# EAGLE board LipStick4 (EAGLE 9.6.2)
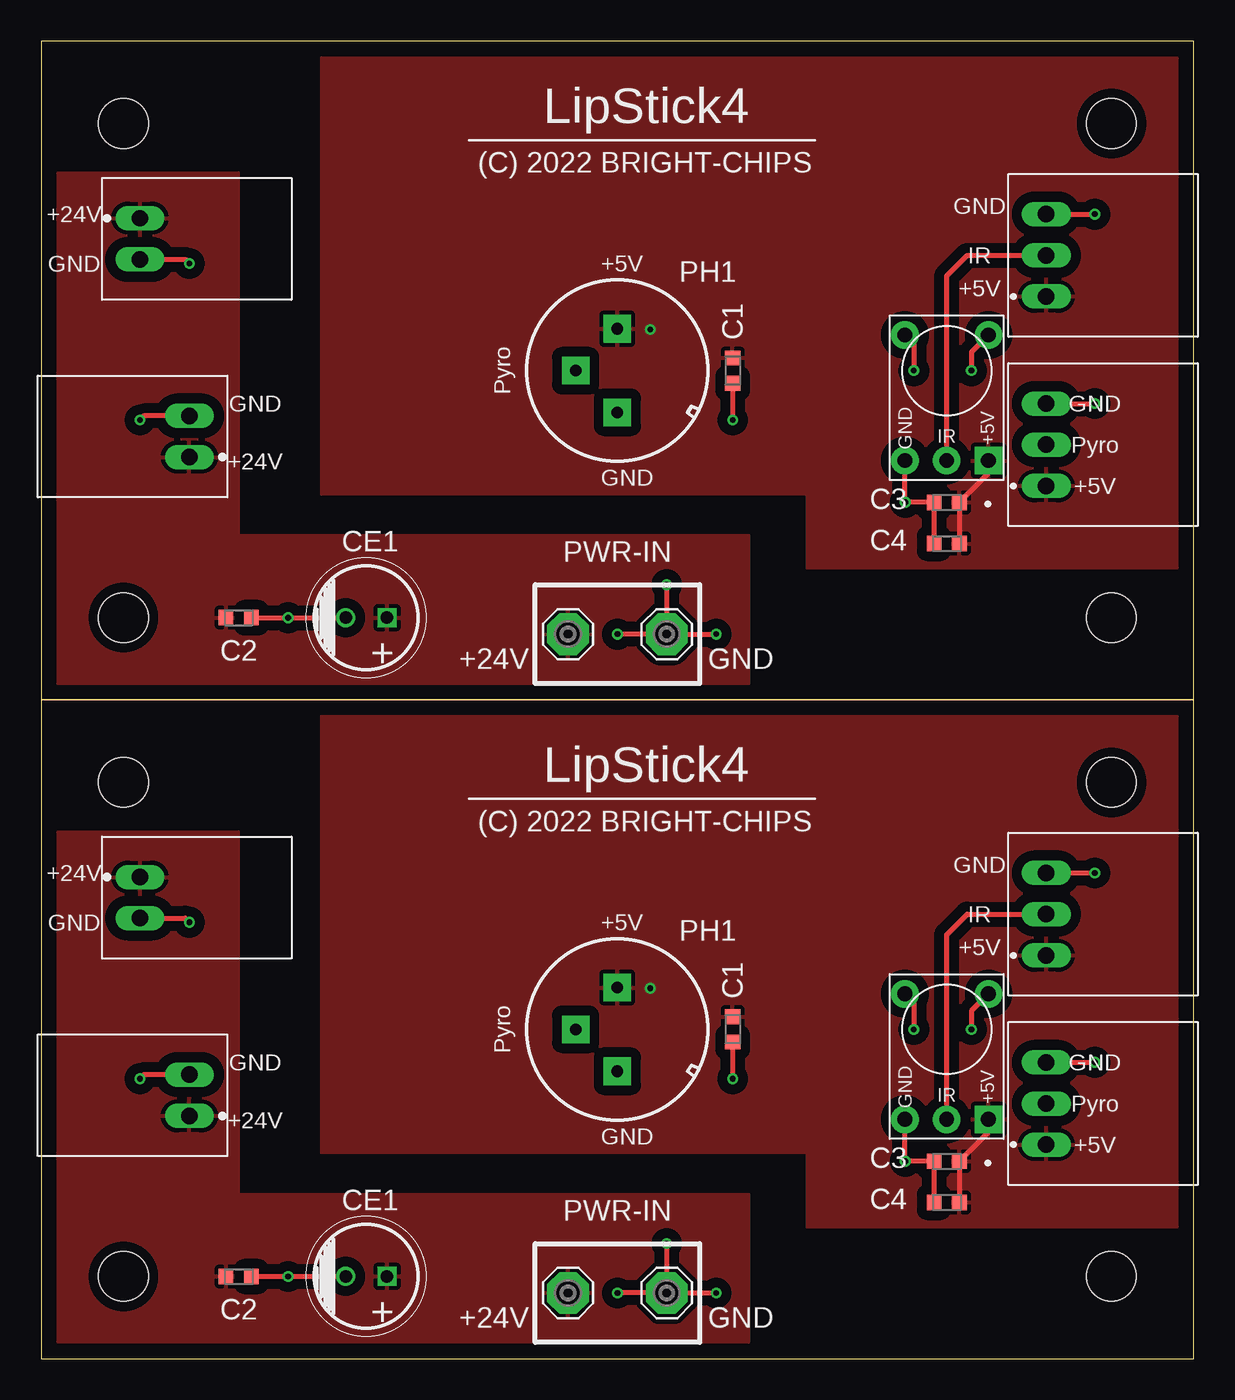
[diagram p0: board, top side]
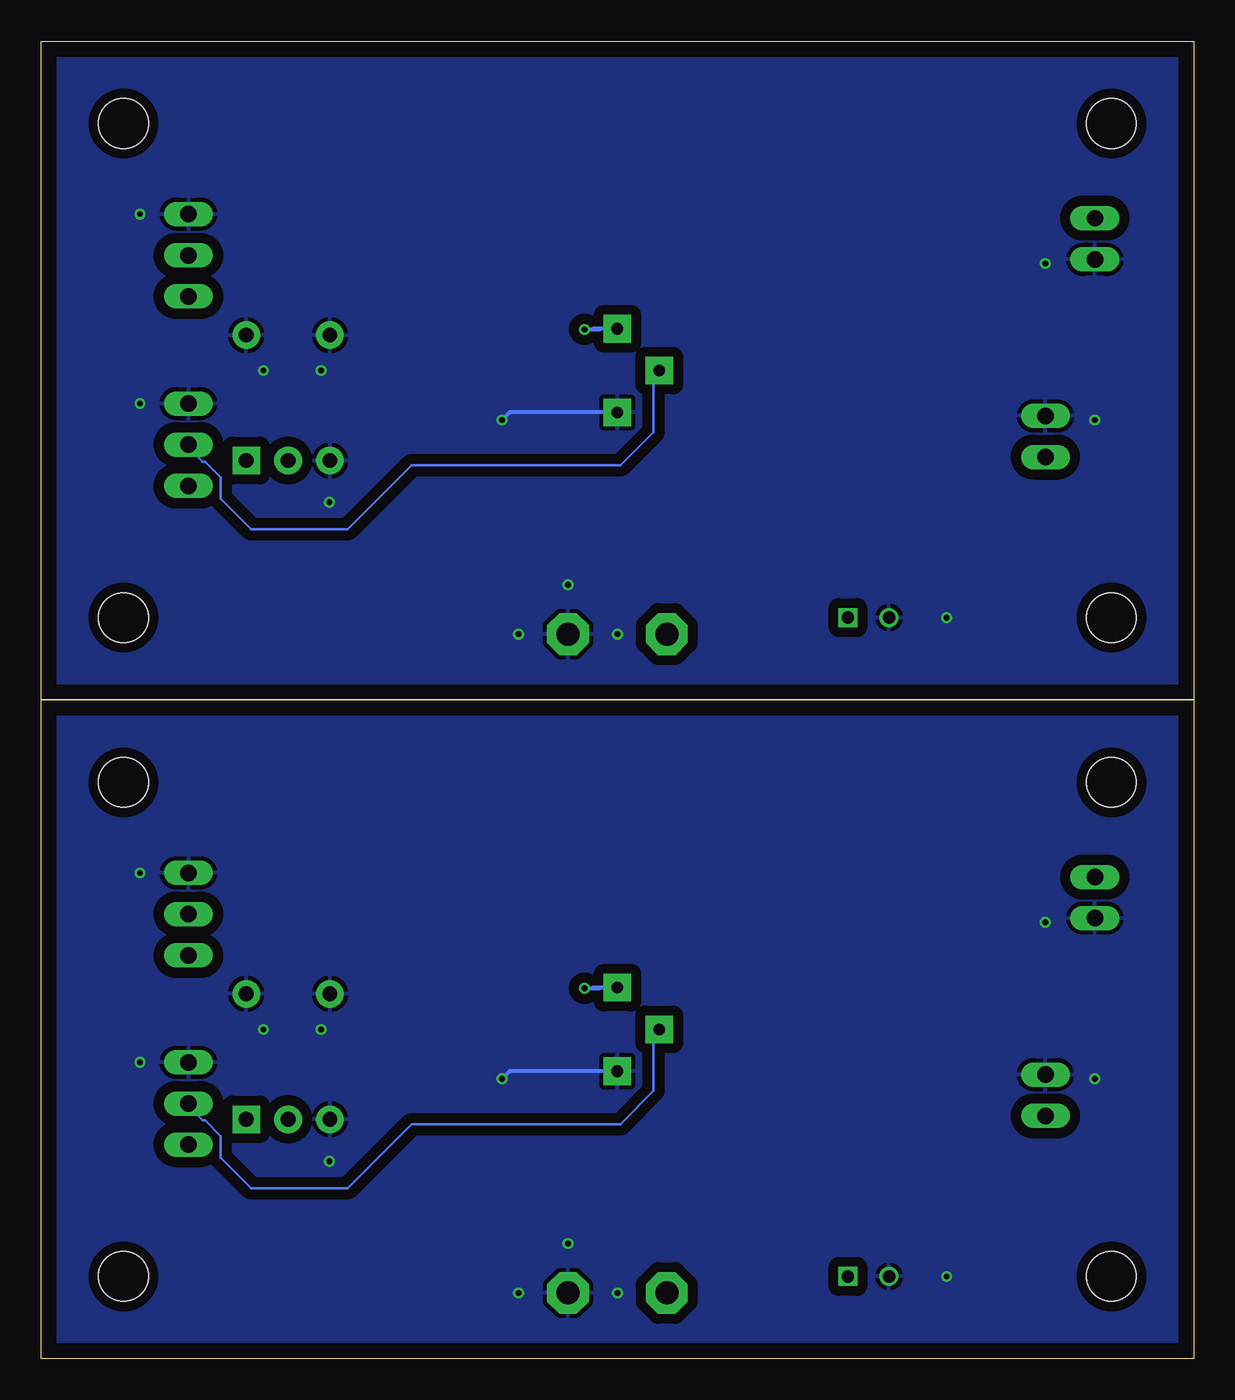
[diagram p1: board, bottom side, seen from below]

Size 70 x 80 mm. Coordinates in mm from the lower left corner, seen from the top.
Outline: 70,40 70,0 0,0 0,40
Outline: 70,40 0,40
Outline: 0,40 70,40
Outline: 70,40 70,80 0,80 0,40
Copper layers (1*16): Top 0.035mm / dielectric 1.6mm / Bottom 0.035mm
Design rules "Elecrow_2-layer_PCB_eagle_rule": minimum track width 6mil, minimum drill 12mil, track to track 6mil, track to pad 6mil, pad to pad 6mil, via to via 8mil, smd to smd 0mil, copper to edge 20mil, drill to drill 10mil, minimum pad ring 6mil, minimum via ring 6mil, stop-mask expansion 0mil, vias tented up to drill 100mil, thermal gap 10mil
Holes 3 mm at 5,35 5,5 65,5 65,35 5,75 5,45 65,45 65,75
vRestrict: 1 lines

## Footprints (pad centres in the part's own frame; a part is rotated, then mirrored left to right if it is on the bottom)
CAPC1608X90N = smd 0.89 x 0.93: 1 -0.77,0; 2 0.77,0
CAPPRD250W55D630H1220 = drill 0.75 pad 1.15 square: 1 0,0 | drill 0.75 pad 1.15: 2 2.5,0
JST_S3B-XH-A(LF)(SN) = drill 1 long: 1 2.5,-3.45; 2 0,-3.45; 3 -2.5,-3.45
SPS-442 = drill 0.9 pad 1.676 square: 1 2.54,-5.46 | drill 0.9 pad 1.676: 2 0,-5.46; 3 -2.54,-5.46; 4 -2.54,2.16; 5 2.54,2.16
SE14 = drill 1.397 pad 2.54 octagon: MP 0,0
JST_S2B-XH-A(LF)(SN) = drill 1 long: 1 -1.25,0; 2 1.25,0
VZ-STANDARD = drill 0.7 pad 1.676 square: 1 2.54,0; 2 0,-2.54; 3 -2.54,0

## Placement (x,y rotation side)
C1  GRM188R71H104KA93D  [CAPC1608X90N]  42,20 90 top
C2  GRM188R71H104KA93D  [CAPC1608X90N]  12,5 180 top
C3  GRM188R71H104KA93D  [CAPC1608X90N]  55,12 180 top
C4  GRM188R71H104KA93D  [CAPC1608X90N]  55,9.5 180 top
C5  GRM188R71H104KA93D  [CAPC1608X90N]  12,45 180 top
C6  GRM188R71H104KA93D  [CAPC1608X90N]  42,60 90 top
C7  GRM188R71H104KA93D  [CAPC1608X90N]  55,52 180 top
C8  GRM188R71H104KA93D  [CAPC1608X90N]  55,49.5 180 top
CE1  ECA-1HM470I  [CAPPRD250W55D630H1220]  21,5 180 top
CE2  ECA-1HM470I  [CAPPRD250W55D630H1220]  21,45 180 top
J1  S3B-XH-A(LF)(SN)  [JST_S3B-XH-A(LF)(SN)]  64.5,55.5 270 top
J2  S3B-XH-A(LF)(SN)  [JST_S3B-XH-A(LF)(SN)]  64.5,15.5 270 top
J3  S3B-XH-A(LF)(SN)  [JST_S3B-XH-A(LF)(SN)]  64.5,67 270 top
J4  S3B-XH-A(LF)(SN)  [JST_S3B-XH-A(LF)(SN)]  64.5,27 270 top
J5  SPS-442  [SPS-442]  55,20 0 top
J6  SPS-442  [SPS-442]  55,60 0 top
LSP1  SE14  [SE14]  32,4 0 top
LSP2  SE14  [SE14]  38,4 0 top
LSP3  SE14  [SE14]  32,44 0 top
LSP4  SE14  [SE14]  38,44 0 top
P1  S2B-XH-A(LF)(SN)  [JST_S2B-XH-A(LF)(SN)]  6,68 270 top
P2  S2B-XH-A(LF)(SN)  [JST_S2B-XH-A(LF)(SN)]  6,28 270 top
P3  S2B-XH-A(LF)(SN)  [JST_S2B-XH-A(LF)(SN)]  9,16 90 top
P4  S2B-XH-A(LF)(SN)  [JST_S2B-XH-A(LF)(SN)]  9,56 90 top
PH1  EKMC1601111  [VZ-STANDARD]  35,20 270 top
PH2  EKMC1601111  [VZ-STANDARD]  35,60 270 top

## Library data of the parts
C1-C8 = GRM188R71H104KA93D; AVAILABILITY: Warning; DESCRIPTION: SMD Capacitor X7R(EIA) with Capacitance: 0.10uF Tol. 10%. Rated Voltage: 50Vdc; MF: Murata; MP: GRM188R71H104KA93D; PACKAGE: 1608 Murata; PRICE: None
CE1 CE2 = LED_base; DESCRIPTION: Panasonic 47uF 50 V Aluminium Electrolytic Capacitor, M Series 2000h 6.3 x 11.2mm; HEIGHT: 12.2mm; MANUFACTURER_NAME: Panasonic; MANUFACTURER_PART_NUMBER: ECA-1HM470I; MOUSER_PART_NUMBER: 667-ECA-1HM470I; MOUSER_PRICE-STOCK: https://www.mouser.co.uk/ProductDetail/Panasonic/ECA-1HM470I?qs=rMMd5vBiahqcxSuGyEdILg%3D%3D
J1-J6 = LED_base; DESCRIPTION: Connector Header Through Hole, Right Angle 3 position 0.098 (2.50mm); DIGI-KEY_PART_NUMBER: 455-2250-ND; MF: JST Sales; MP: S3B-XH-A(LF)(SN); PACKAGE: Custom Package JST Sales
LSP1-LSP4 = solpad
P1-P4 = LED_base; AVAILABILITY: Warning; DESCRIPTION: Connector Header Through Hole, Right Angle 2 position 0.098 (2.50mm); MF: JST Sales; MP: S2B-XH-A(LF)(SN); PACKAGE: None; PRICE: None; PURCHASE-URL: https://pricing.snapeda.com/search/part/S2B-XH-A(LF)(SN)/?ref=eda
PH1 PH2 = LED_base; ARROW_PART_NUMBER: EKMC1601111; ARROW_PRICE-STOCK: https://www.arrow.com/en/products/ekmc1601111/panasonic; DESCRIPTION: Board Mount Motion & Position Sensors Digital 170uA 5m White; HEIGHT: mm; MANUFACTURER_NAME: Panasonic; MANUFACTURER_PART_NUMBER: EKMC1601111; MOUSER_PART_NUMBER: 769-EKMC1601111; MOUSER_PRICE-STOCK: https://www.mouser.co.uk/ProductDetail/Panasonic-Industrial-Devices/EKMC1601111?qs=raAh8RbVwI6ED3w29KeQNg%3D%3D

## Nets
+5V: C1.2 C3.1 C4.1 J2.1 J4.1 J5.1 PH1.3
+5V1: C6.2 C7.1 C8.1 J1.1 J3.1 J6.1 PH2.3
+24V: C2.2 CE1.1 LSP1.MP P2.1 P3.1
+24V1: C5.2 CE2.1 LSP3.MP P1.1 P4.1
GND: C1.1 C2.1 C3.2 C4.2 CE1.2 J2.3 J4.3 J5.3 J5.4 J5.5 LSP2.MP P2.2 P3.2 PH1.1
GND1: C5.1 C6.1 C7.2 C8.2 CE2.2 J1.3 J3.3 J6.3 J6.4 J6.5 LSP4.MP P1.2 P4.2 PH2.1
IR: J4.2 J5.2
IR1: J3.2 J6.2
PYRO: J2.2 PH1.2
PYRO1: J1.2 PH2.2

## Tracks (layer width: path | path; a pad name or v marks a point on that pad's centre or on a via)
+5V  (via drill 0.35)
  Top 0.305: J5.1 57.54,13.77 C3.1 C4.1
  Bottom 0.254: v37,22.5 36.5,22.5 | 36.5,22.5 36.08,22.5 36.04,22.54 | 35.51,22.54 36.46,22.54 36.5,22.5
  pour Top (isolate 0.61): 17,39 17,12.5 46.5,12.5 46.5,8 69,8 69,39
+5V1  (via drill 0.35)
  Top 0.305: J6.1 57.54,53.77 C7.1 C8.1
  Bottom 0.254: v37,62.5 36.5,62.5 | 36.5,62.5 36.08,62.5 36.04,62.54 | 35.51,62.54 36.46,62.54 36.5,62.5
  pour Top (isolate 0.61): 17,79 17,52.5 46.5,52.5 46.5,48 69,48 69,79
+24V
  pour Top (isolate 0.61): 1,32 1,1 43,1 43,10 12,10 12,32
+24V1
  pour Top (isolate 0.61): 1,72 1,41 43,41 43,50 12,50 12,72
GND  (via drill 0.35)
  Top 0.305: LSP2.MP v35,4 | LSP2.MP v38,7 | LSP2.MP v41,4 | C1.1 v42,17 | J4.3 v64,29.5 | J2.3 v64,18 | J5.4 53,21.62 v53,20 | J5.5 56.5,21.12 v56.5,20 | J5.3 52.46,12.04 v52.5,12 C3.2 C4.2 | P3.2 6.25,17.25 v6,17 | P2.2 8.75,26.75 v9,26.5 | C2.1 v15,5 CE1.2
  Bottom 0.254: 35.51,17.46 41.54,17.46 v42,17
  pour Bottom (isolate 0.61): 1,39 1,1 69,1 69,39
GND1  (via drill 0.35)
  Top 0.305: LSP4.MP v35,44 | LSP4.MP v38,47 | LSP4.MP v41,44 | C6.1 v42,57 | J3.3 v64,69.5 | J1.3 v64,58 | J6.4 53,61.62 v53,60 | J6.5 56.5,61.12 v56.5,60 | J6.3 52.46,52.04 v52.5,52 C7.2 C8.2 | P4.2 6.25,57.25 v6,57 | P1.2 8.75,66.75 v9,66.5 | C5.1 v15,45 CE2.2
  Bottom 0.254: 35.51,57.46 41.54,57.46 v42,57
  pour Bottom (isolate 0.61): 1,79 1,41 69,41 69,79
IR
  Top 0.305: J5.2 55,25.75 56.25,27 J4.2
IR1
  Top 0.305: J6.2 55,65.75 56.25,67 J3.2
PYRO
  Bottom 0.152: J2.2 61.11,15.39 60.2,14.48 60.05,14.48 59.09,13.52 59.09,12.22 57.24,10.36 51.45,10.36 51.4,10.35 47.5,14.25 34.82,14.25 32.81,16.26 32.81,19.65 PH1.2
PYRO1
  Bottom 0.152: J1.2 61.11,55.39 60.2,54.48 60.05,54.48 59.09,53.52 59.09,52.22 57.24,50.36 51.45,50.36 51.4,50.35 47.5,54.25 34.82,54.25 32.81,56.26 32.81,59.65 PH2.2

## Text on the board
tPlace: LipStick4 | (C) 2022 BRIGHT-CHIPS | GND | +24V | GND | IR | +5V | +5V | Pyro | GND | GND | GND | IR | +5V | Pyro | +24V | GND | +5V | PWR-IN | + | +24V | GND | LipStick4 | (C) 2022 BRIGHT-CHIPS | GND | +24V | GND | IR | +5V | +5V | Pyro | GND | GND | GND | IR | +5V | Pyro | +24V | GND | +5V | PWR-IN | + | +24V | GND
vRestrict: V-cut | V-cut
_tNames: PH1 | C1 | C3 | C4 | CE1 | C2 | PH1 | C1 | C3 | C4 | CE1 | C2